# Altium PCB ZERORULERV2.PcbDoc (part 1 of 2)
Units mm, origin at the board's own origin, x right, y up, seen from the top; angles counter-clockwise.
Board outline 204.36 x 30 mm, 2 copper layers (Top, Bottom), stack 1.569 mm thick; 78 components, 0 nets, 1415 pads, 0 vias.
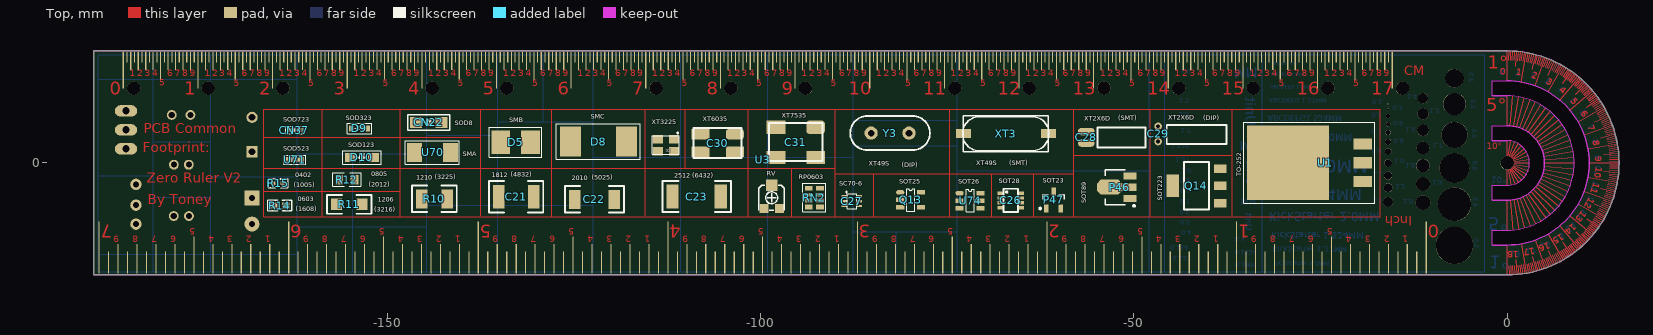
[diagram p0: Top view]
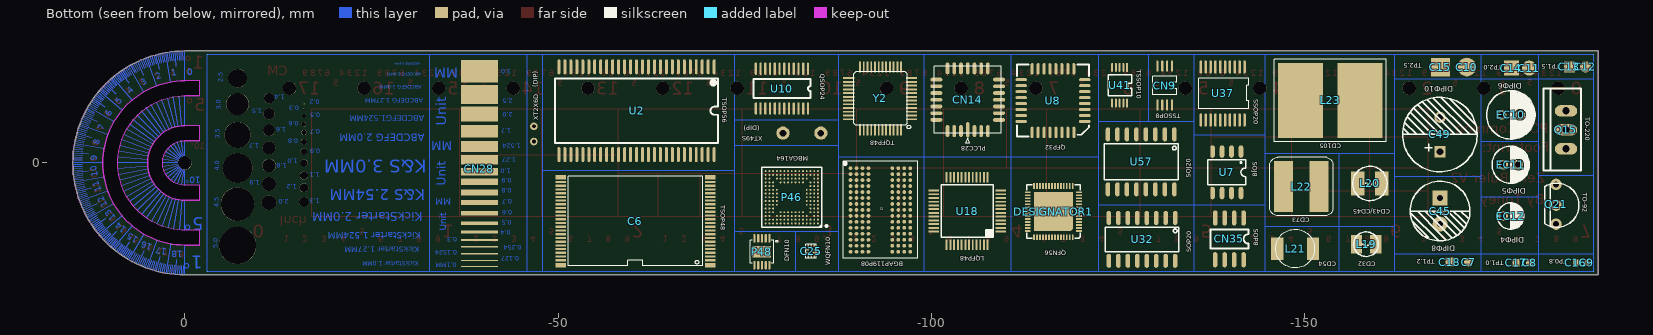
[diagram p1: Bottom view, seen from below]

## Layer stack, top to bottom
Solder Mask Top: solder mask 0.0102, Solder Resist, Dk 3.5
Top: signal copper 0.0343
Dielectric 1: dielectric 1.5, FR-4, Dk 4.3
Bottom: signal copper 0.0343
Solder Mask Bottom: solder mask 0.0102, Solder Resist, Dk 3.5

## Board outline
-189.361,-15 0,-15 ccw(c0,0) 0,15 -189.361,15
cut-out: -2,9 -2,11 0,11 cw(c0,0) 0,-11 -2,-11 -2,-9 0,-9 ccw(c0,0) 0,9
cut-out: -2,3 -2,5 0,5 cw(c0,0) 0,-5 -2,-5 -2,-3 0,-3 ccw(c0,0) 0,3

## Design rules (kind name [scope] priority, off if disabled: settings)
Clearance "Clearance - Default - DEFAULT- SMD" [IsVia vs IsSMTPin] p1: gap=0.152 ignorepadtopadclearanceinfootprint=FALSE
Clearance "Clearance - Default - DEFAULT - Via" [IsVia vs IsVia] p2: gap=0.152 ignorepadtopadclearanceinfootprint=FALSE
Clearance "Clearance - Default - DEFAULT - Net" [All] p3: gap=0.152 ignorepadtopadclearanceinfootprint=FALSE except(0: Arc-Hole Track-Hole SMDPad-Hole THPad-Hole Via-Hole Fill-Hole Poly-Hole Region-Hole Text-Hole; 0.254: Text-Text)
ComponentClearance "ComponentClearance - Default - DEFAULT" [All] p1: gap=0.152 collisioncheckmode=3 verticalgap=0.254 showdistances=FALSE
FanoutControl Fanout_Small [(CompPinCount < 5)] p3: bgadir=Out bgaviamode=Centered fanoutstyle=Auto fanoutdirection=OutThenIn viagrid=0.025 // Fanout_Small (Default Rule)
FanoutControl Fanout_SOIC [IsSOIC] p4: bgadir=Out bgaviamode=Centered fanoutstyle=Auto fanoutdirection=Alternating viagrid=0.025 // Fanout_SOIC (Default Rule)
HoleToHoleClearance "HoleToHoleClearance - Default - DEFAULT" [All] p1: gap=0.152 allowstackedmicrovias=TRUE
Length "Default Length" [All] p1: maxlimit=1270 minlimit=0
MaxMinImpedance "Default Impedance" [All] p1: minimum=50.00 maximum=150.0
ParallelSegment "Default Parallel Segment Adjasent" [All] p1: limit=25.4 gap=5.08
ParallelSegment "Default Parallel Segment Same Layer" [All] p2: limit=25.4 gap=5.08
PlaneConnect "Default PlaneConnect" [All] p1: planeconnectstyle=Relief reliefexpansion=0.508 reliefentries=0 reliefconductorwidth=0.381 reliefairgap=0.254
PolygonConnect "PolygonConnect - Default SMT" [IsSMTPin] p1: connectstyle=Relief reliefconductorwidth=0.254 reliefentries=4 polygonreliefangle="45 Angle" airgapwidth=0.254
PolygonConnect "PolygonConnect - Default Pad" [All] p2: connectstyle=Relief reliefconductorwidth=0.381 reliefentries=4 polygonreliefangle="45 Angle" airgapwidth=0.254
RoutingLayers "RoutingLayers - Default - DEFAULT" [All] p1: top layer_v5=TRUE bottom layer_v5=TRUE
RoutingPriority "RoutingPriority - Default - DEFAULT" [All] p1: routingpriority=3
RoutingTopology "Default Routing Topology" [All] p1: topology=Shortest
RoutingVias "RoutingVias - Default - DEFAULT" [All] p1: holewidth=0.94 width=1.397 viastyle="Through Hole" minholewidth=0.94 minwidth=1.397 maxholewidth=0.94 maxwidth=1.397
SMDToCorner "SMDToCorner - Default - DEFAULT" [All] p1: distance=60000
SolderMaskExpansion [All] p1: expansion=0.102
Width "Default Width" [All] p1: maxlimit=0.305 minlimit=0.152 preferedwidth=0.152
22 further rules are at their usual default settings.

## Components (designator, comment, footprint, x,y, rotation, side; value= is the part's Value field where it differs from the comment)
C4 "BGA119P08" BGA119P08 -93.17,-6.296 r180 bottom
C6 "TSOP-48A" TSOP-48A -70.352,-13.546 r90 bottom
C7 "TP1F" TP1F -171.969,-13.291 r180 bottom
C8 "TP1E" TP1E -180.168,-13.393 r90 bottom
C9 "TP1D" TP1D -187.801,-13.338 r180 bottom
C10 "TP1A" TP1A -171.749,12.852 r270 bottom
C11 "TP1B" TP1B -180.1,12.7 r180 bottom
C12 "TP1CA" TP1CA -187.631,12.863 r180 bottom
C13 "TP1CAA" TP1CAA -185.483,12.863 r180 bottom
C14 "TP1BA" TP1BA -177.7,12.7 r180 bottom
C15 "TP1AA" TP1AA -168.206,12.834 r270 bottom
C16 "TP1DA" TP1DA -186.351,-13.338 r180 bottom
C17 "TP1EA" TP1EA -178.325,-13.393 r90 bottom
C18 "TP1FA" TP1FA -169.446,-13.292 r180 bottom
C21 "1812" 1812 -132.759,-4.532 r0 top
C22 "2010" 2010 -122.258,-4.877 r0 top
C23 "2512" 2512 -108.561,-4.5 r0 top
C25 "WQFN10" WQFN10 -83.888,-11.842 r90 bottom
C26 "SOT28" SOT28 -66.484,-5.014 r0 top
C27 "SC70-6" SC70-6 -87.79,-5.126 r270 top
C28 "XT2X6AA" XT2X6AA -56.361,3.433 r270 top
C29 "XT2X6DAA" XT2X6DAA -46.529,3.818 r90 top
C30 "XT6035SMD" XT6035SMD -105.749,2.664 r180 top
C31 "XT7535SMD" XT7535SMD -94.937,2.778 r180 top
C32 "XT3225SMD" XT3225SMD -112.706,2.387 r180 top
C45 "ECAP3.5$2F$8-DY#" ECAP3.5$2F$8-DY# -168.149,-4.688 r270 bottom
C49 "ECAP-V-4.6$2F$11-DY#" ECAP-V-4.6$2F$11-DY# -168.133,3.811 r90 bottom
CN9 "TSSOP8" TSSOP8 -131.259,10.372 r0 bottom
CN14 "PLCC28" PLCC28 -104.868,8.468 r0 bottom
CN22 "IN4148" IN4148 -144.447,5.422 r180 top
CN28 "PITCHAAAAA" PITCHAAAAA -42.943,0.339 r0 bottom
CN35 "SOP-8" SOP-8 -141.83,-7.381 r270 bottom
CN37 "SOD723" SOD723 -162.451,4.403 r0 top
D5 "SMB" SMB -132.829,2.778 r90 top
D8 "SMC" SMC -121.711,2.873 r0 top
D9 "SOD323" SOD323 -153.627,4.624 r0 top
D10 "SOD-123FL1AAA-DY" SOD-123FL1AAA-DY -153.357,0.755 r180 top
DESIGNATOR1 "QFN56" QFN56 -119.859,-3.014 r0 bottom
EC10 "EC6" EC6 -177.645,6.441 r180 bottom
EC11 "EC5" EC5 -177.602,-0.234 r180 bottom
EC12 "EC4" EC4 -176.592,-7.122 r180 bottom
L19 "L-SMD-4.5AA" L-SMD-4.5AA -158.244,-10.885 r0 bottom
L20 "L-SMD-4.5" L-SMD-4.5 -158.747,-2.751 r0 bottom
L21 "CD54A" CD54A -148.73,-11.473 r90 bottom
L22 "SP6D38" SP6D38 -147.141,-3.161 r90 bottom
L23 "150L" 150L -153.438,8.37 r180 bottom
P46 "Comment" SOT-89 -51.943,-3.251 r180 top
P46 "Comment" MBGA164 -81.3,-4.6 r0 bottom
P47 "Comment" SOT23-3 -60.757,-4.953 r90 top
P48 "Comment" DFN-10 -77.3,-11.9 r270 bottom
Q13 "SOT25" SOT25 -79.9,-5 r0 top
Q14 "SOT223" SOT223 -41.606,-3.065 r90 top
Q15 "TO220-123-DY#" TO220-123-DY# -185.022,1.888 r180 bottom
Q21 "SOT233" SOT233 -183.695,-5.659 r270 bottom
R10 "1210" 1210 -143.706,-4.804 r0 top
R11 "1206" 1206 -155.114,-5.542 r180 top
R12 "0805" 0805 -155.424,-2.243 r180 top
R14 "0603" 0603 -164.399,-5.711 r180 top
R15 "0402" 0402 -164.657,-2.747 r0 top
RN2 "R-2X4P" R-2X4P -92.778,-4.645 r90 top
RV "VR" VR -98.525,-1.07 r180 top
U1 "AIC1084AAAAAA" AIC1084AAAAAA -22.347,0.031 r90 top
U2 "TSOP54P" TSOP54P -60.5,7 r0 bottom
U3 "RULE17AA" RULE17AA -86.079,1.599 r0 top locked
U7 "SOJ8-1.25" SOJ8-1.25 -141.479,1.528 r0 bottom
U8 "QFP32" QFP32 -116.292,8.354 r0 bottom
U10 "QSOP24" QSOP24 -79.977,9.955 r270 bottom
U18 "LQFP48-0.5" LQFP48-0.5 -104.796,-6.443 r90 bottom
U32 "74HC139" 74HC139 -128.221,-10.237 r0 bottom
U37 "SSOP-PCM1606E" SSOP-PCM1606E -137.728,9.307 r270 bottom
U41 "TSSOP-10" TSSOP-10 -125.22,10.412 r0 bottom
U57 "SOJ16" SOJ16 -128.1,0.152 r0 bottom
U70 "SMA" SMA -146.088,1.398 r0 top
U71 "SOD523-DY#" SOD523-DY# -162.414,0.45 r0 top
U74 "SOT26" SOT26 -71.939,-5.046 r0 top
XT3 "XTAL5$2F$S" XTAL5$2F$S -67.139,3.923 r0 top
Y2 "TQFP48" TQFP48 -93.194,8.609 r0 bottom
Y3 "X1" X1 -80.12,4 r0 top

## Footprints (in the part's own frame and the unit in brackets; to place one, negate y for a bottom-side part, rotate by r counter-clockwise, add the part's x,y. Pads: shape width x height; smd on the part's side, far side on the other; paste and mask are expansions set on the pad)
74HC139 [mil]
  oval 24x74 smd: 1(-175,-113) 2(-125,-113) 3(-75,-113) 4(-25,-113) 5(25,-113) 6(75,-113) 7(125,-113) 8(175,-113) 9(175,113) 10(125,113) 11(75,113) 12(25,113) 13(-25,113) 14(-75,113) 15(-125,113) 16(-175,113)
  silkscreen extent -195,-65 195,65
150L [mm]
  rect 6x10 smd: 1(-4,0) 2(4,0)
  silkscreen extent -7.5,-5.5 7.5,5.5
0402 [mil]
  rect 25x20 smd: 1(-25,0) 2(25,0)
  silkscreen extent -51,-24 51,24
0603 [mil]
  rect 38x30 smd: 1(-31,0) 2(31,0)
  silkscreen extent -63,-28 63,28
0805 [mil]
  rect 40x50 smd: 1(-40,0) 2(40,0)
  silkscreen extent -75,-36 75,36
1206 [mil]
  rect 60x60 smd: 1(-67.5,0) 2(67.5,0)
  silkscreen extent -118,-50 118,50
1210 [mil]
  rect 60x100 smd: 1(-67.5,0) 2(67.5,0)
  silkscreen extent -118,-70 118,70
1812 [mil]
  rect 60x125 smd: 1(-92.5,0) 2(92.5,0)
  silkscreen extent -143,-82 143,82
2010 [mil]
  rect 60x100 smd: 1(-105,0) 2(105,0)
  silkscreen extent -155,-70 155,70
2512 [mil]
  rect 65x125 smd: 1(-127.5,0) 2(127.5,0)
  silkscreen extent -180,-82 180,82
AIC1084AAAAAA [mm]
  rect 1.5x2.5 smd: 1(-2.5,-3) 2(0,-3) 3(2.5,-3)
  rect 10x11 smd: 4(0,7)
  silkscreen extent -5.4,-4.65 5.4,12.9
BGA119P08 [mm]
  round 0.5 smd: A1(-4,5.6) A2(-3.2,5.6) A3(-2.4,5.6) A4(-1.6,5.6) A8(1.6,5.6) A9(2.4,5.6) A10(3.2,5.6) A11(4,5.6) B1(-4,4.8) B2(-3.2,4.8) B3(-2.4,4.8) B4(-1.6,4.8) B8(1.6,4.8) B9(2.4,4.8) B10(3.2,4.8) B11(4,4.8) C1(-4,4) C2(-3.2,4) C3(-2.4,4) C4(-1.6,4) C8(1.6,4) C9(2.4,4) C10(3.2,4) C11(4,4) D1(-4,3.2) D2(-3.2,3.2) D3(-2.4,3.2) D4(-1.6,3.2) D8(1.6,3.2) D9(2.4,3.2) D10(3.2,3.2) D11(4,3.2) E1(-4,2.4) E2(-3.2,2.4) E3(-2.4,2.4) E4(-1.6,2.4) E8(1.6,2.4) E9(2.4,2.4) E10(3.2,2.4) E11(4,2.4) F1(-4,1.6) F2(-3.2,1.6) F3(-2.4,1.6) F4(-1.6,1.6) F8(1.6,1.6) F9(2.4,1.6) F10(3.2,1.6) F11(4,1.6) G1(-4,0.8) G2(-3.2,0.8) G3(-2.4,0.8) G4(-1.6,0.8) G8(1.6,0.8) G9(2.4,0.8) G10(3.2,0.8) G11(4,0.8) H1(-4,0) H2(-3.2,0) H3(-2.4,0) H4(-1.6,0) H8(1.6,0) H9(2.4,0) H10(3.2,0) H11(4,0) J1(-4,-0.8) J2(-3.2,-0.8) J3(-2.4,-0.8) J4(-1.6,-0.8) J8(1.6,-0.8) J9(2.4,-0.8) J10(3.2,-0.8) J11(4,-0.8) K1(-4,-1.6) K2(-3.2,-1.6) K3(-2.4,-1.6) K4(-1.6,-1.6) K8(1.6,-1.6) K9(2.4,-1.6) K10(3.2,-1.6) K11(4,-1.6) L1(-4,-2.4) L2(-3.2,-2.4) L3(-2.4,-2.4) L4(-1.6,-2.4) L8(1.6,-2.4) L9(2.4,-2.4) L10(3.2,-2.4) L11(4,-2.4) M1(-4,-3.2) M2(-3.2,-3.2) M3(-2.4,-3.2) M4(-1.6,-3.2) M8(1.6,-3.2) M9(2.4,-3.2) M10(3.2,-3.2) M11(4,-3.2) N1(-4,-4) N2(-3.2,-4) N3(-2.4,-4) N4(-1.6,-4) N8(1.6,-4) N9(2.4,-4) N10(3.2,-4) N11(4,-4) P1(-4,-4.8) P2(-3.2,-4.8) P3(-2.4,-4.8) P4(-1.6,-4.8) P8(1.6,-4.8) P9(2.4,-4.8) P10(3.2,-4.8) P11(4,-4.8) R1(-4,-5.6) R2(-3.2,-5.6) R3(-2.4,-5.6) R4(-1.6,-5.6) R8(1.6,-5.6) R9(2.4,-5.6) R10(3.2,-5.6) R11(4,-5.6)
  silkscreen extent -5,-6.5 5,6.5
CD54A [mm]
  rect 3x1.65 smd: 1(0,2.4) 2(0,-2.4)
  silkscreen extent -2.6,-2.6 2.6,2.6
DFN-10 [mm]
  rect 1.15x0.3 smd: 1(-1.8,1)
  oval 1.15x0.3 smd: 2(-1.8,0.5) 3(-1.8,0) 4(-1.8,-0.5) 5(-1.8,-1) 6(1.8,-1) 7(1.8,-0.5) 8(1.8,0) 9(1.8,0.5) 10(1.8,1)
  rect 1.55x2.48 smd: 11(0,0)
  silkscreen extent -1.55,-1.55 1.55,2.14, body extent -1.5,-1.5 1.5,1.5, height 0.8
EC4 [mil]
  round 52 hole 32: 1(0,0) 2(80,0)
  silkscreen extent -30,-70 110,70
EC5 [mil]
  round 52 hole 32: 1(-39,0) 2(39.74,0)
  silkscreen extent -98,-98 99,98
EC6 [mil]
  round 52 hole 32: 1(-49.21,0) 2(49.21,0)
  silkscreen extent -128,-128 128,128
ECAP3.5$2F$8-DY# [mm]
  rect 2x2 hole 0.8: 1(0,0)
  round 2 hole 0.8: 2(3.5,0)
  silkscreen extent -2.25,-4 5.75,4
ECAP-V-4.6$2F$11-DY# [mm]
  rect 1.5x1.5 hole 0.9: 1(-2.3,0)
  round 1.5 hole 0.9: 2(2.3,0)
  silkscreen extent -5,-5 5,5
IN4148 [mm]
  rect 1.6x1.5 smd: 1(-1.7,0) 2(1.7,0)
  silkscreen extent -2.81,-1 2.8,1.02
L-SMD-4.5 [mm]
  rect 1.8x3.2 smd: 1(-1.6,0) 2(1.6,0)
  silkscreen extent -2.3,-2.3 2.3,2.3
L-SMD-4.5AA [mm]
  rect 1.5x2.5 smd: 1(-1.3,0) 2(1.3,0)
  silkscreen extent -1.65,-1.65 1.65,1.65
LQFP48-0.5 [mm]
  rect 0.254x1.397 smd: 1(-2.75,-4.5) 2(-2.25,-4.5) 3(-1.75,-4.5) 4(-1.25,-4.5) 5(-0.75,-4.5) 6(-0.25,-4.5) 7(0.25,-4.5) 8(0.75,-4.5) 9(1.25,-4.5) 10(1.75,-4.5) 11(2.25,-4.5) 12(2.75,-4.5) 25(2.75,4.5) 26(2.25,4.5) 27(1.75,4.5) 28(1.25,4.5) 29(0.75,4.5) 30(0.25,4.5) 31(-0.25,4.5) 32(-0.75,4.5) 33(-1.25,4.5) 34(-1.75,4.5) 35(-2.25,4.5) 36(-2.75,4.5)
  rect 1.397x0.254 smd: 13(4.5,-2.75) 14(4.5,-2.25) 15(4.5,-1.75) 16(4.5,-1.25) 17(4.5,-0.75) 18(4.5,-0.25) 19(4.5,0.25) 20(4.5,0.75) 21(4.5,1.25) 22(4.5,1.75) 23(4.5,2.25) 24(4.5,2.75) 37(-4.5,2.75) 38(-4.5,2.25) 39(-4.5,1.75) 40(-4.5,1.25) 41(-4.5,0.75) 42(-4.5,0.25) 43(-4.5,-0.25) 44(-4.5,-0.75) 45(-4.5,-1.25) 46(-4.5,-1.75) 47(-4.5,-2.25) 48(-4.5,-2.75)
  silkscreen extent -3.5,-3.5 3.5,3.5
MBGA164 [mm] "BGA, 164-Leads, Body 8x8mm, Pitch 0.5mm"
  round 0.25 smd: A1(-3.5,3.5) A2(-3,3.5) A3(-2.5,3.5) A4(-2,3.5) A5(-1.5,3.5) A6(-1,3.5) A7(-0.5,3.5) A8(0,3.5) A9(0.5,3.5) A10(1,3.5) A11(1.5,3.5) A12(2,3.5) A13(2.5,3.5) A14(3,3.5) A15(3.5,3.5) B1(-3.5,3) B2(-3,3) B3(-2.5,3) B4(-2,3) B5(-1.5,3) B6(-1,3) B7(-0.5,3) B8(0,3) B9(0.5,3) B10(1,3) B11(1.5,3) B12(2,3) B13(2.5,3) B14(3,3) B15(3.5,3) C1(-3.5,2.5) C2(-3,2.5) C4(-2,2.5) C5(-1.5,2.5) C6(-1,2.5) C7(-0.5,2.5) C8(0,2.5) C9(0.5,2.5) C10(1,2.5) C11(1.5,2.5) C12(2,2.5) C14(3,2.5) C15(3.5,2.5) D1(-3.5,2) D2(-3,2) D3(-2.5,2) D5(-1.5,2) D6(-1,2) D7(-0.5,2) D8(0,2) D9(0.5,2) D10(1,2) D11(1.5,2) D13(2.5,2) D14(3,2) D15(3.5,2) E1(-3.5,1.5) E2(-3,1.5) E3(-2.5,1.5) E13(2.5,1.5) E14(3,1.5) E15(3.5,1.5) F1(-3.5,1) F2(-3,1) F3(-2.5,1) F4(-2,1) F12(2,1) F13(2.5,1) F14(3,1) F15(3.5,1) G1(-3.5,0.5) G2(-3,0.5) G3(-2.5,0.5) G4(-2,0.5) G12(2,0.5) G13(2.5,0.5) G14(3,0.5) G15(3.5,0.5) H1(-3.5,0) H2(-3,0) H3(-2.5,0) H4(-2,0) H12(2,0) H13(2.5,0) H14(3,0) H15(3.5,0) J1(-3.5,-0.5) J2(-3,-0.5) J3(-2.5,-0.5) J4(-2,-0.5) J12(2,-0.5) J13(2.5,-0.5) J14(3,-0.5) J15(3.5,-0.5) K1(-3.5,-1) K2(-3,-1) K3(-2.5,-1) K4(-2,-1) K12(2,-1) K13(2.5,-1) K14(3,-1) K15(3.5,-1) L1(-3.5,-1.5) L2(-3,-1.5) L3(-2.5,-1.5) L13(2.5,-1.5) L14(3,-1.5) L15(3.5,-1.5) M1(-3.5,-2) M2(-3,-2) M3(-2.5,-2) M5(-1.5,-2) M6(-1,-2) M7(-0.5,-2) M8(0,-2) M9(0.5,-2) M10(1,-2) M11(1.5,-2) M13(2.5,-2) M14(3,-2) M15(3.5,-2) N1(-3.5,-2.5) N2(-3,-2.5) N4(-2,-2.5) N5(-1.5,-2.5) N6(-1,-2.5) N7(-0.5,-2.5) N8(0,-2.5) N9(0.5,-2.5) N10(1,-2.5) N11(1.5,-2.5) N12(2,-2.5) N14(3,-2.5) N15(3.5,-2.5) P1(-3.5,-3) P2(-3,-3) P3(-2.5,-3) P4(-2,-3) P5(-1.5,-3) P6(-1,-3) P7(-0.5,-3) P8(0,-3) P9(0.5,-3) P10(1,-3) P11(1.5,-3) P12(2,-3) P13(2.5,-3) P14(3,-3) P15(3.5,-3) R1(-3.5,-3.5) R2(-3,-3.5) R3(-2.5,-3.5) R4(-2,-3.5) R5(-1.5,-3.5) R6(-1,-3.5) R7(-0.5,-3.5) R8(0,-3.5) R9(0.5,-3.5) R10(1,-3.5) R11(1.5,-3.5) R12(2,-3.5) R13(2.5,-3.5) R14(3,-3.5) R15(3.5,-3.5)
  silkscreen extent -4.77,-4 4,4, body extent -4,-4 4,4, height 1.2
PITCHAAAAA [mm]
  rect 5x0.1 smd: 1(3.481,14.233)
  rect 5x0.127 smd: 2(3.481,13.428)
  rect 5x0.152 smd: 3(3.481,12.507)
  rect 5x0.2 smd: 4(3.481,11.589)
  rect 5x0.3 smd: 5(3.481,10.647)
  rect 5x0.4 smd: 6(3.481,9.592)
  rect 5x0.5 smd: 7(3.481,8.409)
  rect 5x0.6 smd: 8(3.481,7.105)
  rect 5x0.7 smd: 9(3.481,5.645)
  rect 5x0.8 smd: 10(3.481,4.311)
  rect 5x0.9 smd: 11(3.481,2.852)
  rect 5x1 smd: 12(3.481,1.509)
  rect 5x1.25 smd: 13(3.481,-0.081)
  rect 5x1.5 smd: 14(3.481,-1.874)
  rect 5x1.7 smd: 15(3.481,-3.915)
  rect 5x2 smd: 16(3.481,-6.191)
  rect 5x2.5 smd: 17(3.481,-8.84)
  rect 5x3 smd: 18(3.481,-11.971)
PLCC28 [mm]
  oval 0.5x2 smd: 1(0,4)
  oval 0.5x1.6 smd: 2(-0.9,4.2) 3(-1.8,4.2) 4(-2.7,4.2) 12(-2.7,-4.2) 13(-1.8,-4.2) 14(-0.9,-4.2) 15(0,-4.2) 16(0.9,-4.2) 17(1.8,-4.2) 18(2.7,-4.2) 26(2.7,4.2) 27(1.8,4.2) 28(0.9,4.2)
  oval 1.6x0.5 smd: 5(-4.2,2.7) 6(-4.2,1.8) 7(-4.2,0.9) 8(-4.2,0) 9(-4.2,-0.9) 10(-4.2,-1.8) 11(-4.2,-2.7) 19(4.2,-2.7) 20(4.2,-1.8) 21(4.2,-0.9) 22(4.2,0) 23(4.2,0.9) 24(4.2,1.8) 25(4.2,2.7)
  silkscreen extent -4.5,-4.5 4.5,5.8
QFN56 [mm]
  rect 0.75x0.22 smd: 1(0.075,6.1) 2(0.075,5.7) 3(0.075,5.3) 4(0.075,4.9) 5(0.075,4.5) 6(0.075,4.1) 7(0.075,3.7) 8(0.075,3.3) 9(0.075,2.9) 10(0.075,2.5) 11(0.075,2.1) 12(0.075,1.7) 13(0.075,1.3) 14(0.075,0.9) 29(6.925,0.9) 30(6.925,1.3) 31(6.925,1.7) 32(6.925,2.1) 33(6.925,2.5) 34(6.925,2.9) 35(6.925,3.3) 36(6.925,3.7) 37(6.925,4.1) 38(6.925,4.5) 39(6.925,4.9) 40(6.925,5.3) 41(6.925,5.7) 42(6.925,6.1)
  rect 0.22x0.75 smd: 15(0.9,0.075) 16(1.3,0.075) 17(1.7,0.075) 18(2.1,0.075) 19(2.5,0.075) 20(2.9,0.075) 21(3.3,0.075) 22(3.7,0.075) 23(4.1,0.075) 24(4.5,0.075) 25(4.9,0.075) 26(5.3,0.075) 27(5.7,0.075) 28(6.1,0.075) 43(6.1,6.925) 44(5.7,6.925) 45(5.3,6.925) 46(4.9,6.925) 47(4.5,6.925) 48(4.1,6.925) 49(3.7,6.925) 50(3.3,6.925) 51(2.9,6.925) 52(2.5,6.925) 53(2.1,6.925) 54(1.7,6.925) 55(1.3,6.925) 56(0.9,6.925)
  rect 5.2x4.9 smd: 57(3.5,3.35)
  oct 1.2x1.2 smd: $$$1(1.5,5.5)
  rect 4.5x0.3 smd: $$$2(3.85,5.95)
  silkscreen extent -0.1,-0.1 7.1,7.1
QFP32 [mil]
  oval 60x16 smd: 1(-167.5,110.25) 2(-167.5,78.75) 3(-167.5,47.25) 4(-167.5,15.75) 5(-167.5,-15.75) 6(-167.5,-47.25) 7(-167.5,-78.75) 8(-167.5,-110.25) 17(167.5,-110.25) 18(167.5,-78.75) 19(167.5,-47.25) 20(167.5,-15.75) 21(167.5,15.75) 22(167.5,47.25) 23(167.5,78.75) 24(167.5,110.25)
  oval 16x60 smd: 9(-110.25,-167.5) 10(-78.75,-167.5) 11(-47.25,-167.5) 12(-15.75,-167.5) 13(15.75,-167.5) 14(47.25,-167.5) 15(78.75,-167.5) 16(110.25,-167.5) 25(110.25,167.5) 26(78.75,167.5) 27(47.25,167.5) 28(15.75,167.5) 29(-15.75,167.5) 30(-47.25,167.5) 31(-78.75,167.5) 32(-110.25,167.5)
  silkscreen extent -190,-190 190,190
QSOP24 [mil]
  oval 65x12 smd: 1(-105,137.5) 2(-105,112.5) 3(-105,87.5) 4(-105,62.5) 5(-105,37.5) 6(-105,12.5) 7(-105,-12.5) 8(-105,-37.5) 9(-105,-62.5) 10(-105,-87.5) 11(-105,-112.5) 12(-105,-137.5) 13(105,-137.5) 14(105,-112.5) 15(105,-87.5) 16(105,-62.5) 17(105,-37.5) 18(105,-12.5) 19(105,12.5) 20(105,37.5) 21(105,62.5) 22(105,87.5) 23(105,112.5) 24(105,137.5)
  silkscreen extent -50,-150 50,150
R-2X4P [mil]
  rect 25x40 smd: 1(-50,-29) 4(50,-29) 5(50,31) 8(-50,31)
  rect 20x40 smd: 2(-15,-29) 3(15,-29) 6(15,31) 7(-15,31)
  silkscreen extent -75,-59 75,61
RULE17AA [mm]
  rect 0.15x7 smd: 201(-102.547,-12.937) 221(-77.147,-12.937) 241(-51.747,-12.937) 261(-26.347,-12.937) 281(-0.947,-12.937) 301(24.453,-12.937) 321(49.853,-12.937) 341(75.253,-12.937)
  rect 0.15x3 smd: 202(-101.277,-14.937) 204(-98.737,-14.937) 206(-96.197,-14.937) 208(-93.657,-14.937) 210(-91.117,-14.937) 212(-88.577,-14.937) 214(-86.037,-14.937) 216(-83.497,-14.937) 218(-80.957,-14.937) 220(-78.417,-14.937) 222(-75.877,-14.937) 224(-73.337,-14.937) 226(-70.797,-14.937) 228(-68.257,-14.937) 230(-65.717,-14.937) 232(-63.177,-14.937) 234(-60.637,-14.937) 236(-58.097,-14.937) 238(-55.557,-14.937) 240(-53.017,-14.937) 242(-50.477,-14.937) 244(-47.937,-14.937) 246(-45.397,-14.937) 248(-42.857,-14.937) 250(-40.317,-14.937) 252(-37.777,-14.937) 254(-35.237,-14.937) 256(-32.697,-14.937) 258(-30.157,-14.937) 260(-27.617,-14.937) 262(-25.077,-14.937) 264(-22.537,-14.937) 266(-19.997,-14.937) 268(-17.457,-14.937) 270(-14.917,-14.937) 272(-12.377,-14.937) 274(-9.837,-14.937) 276(-7.297,-14.937) 278(-4.757,-14.937) 280(-2.217,-14.937) 282(0.323,-14.937) 284(2.863,-14.937) 286(5.403,-14.937) 288(7.943,-14.937) 290(10.483,-14.937) 292(13.023,-14.937) 294(15.563,-14.937) 296(18.103,-14.937) 298(20.643,-14.937) 300(23.183,-14.937) 302(25.723,-14.937) 304(28.263,-14.937) 306(30.803,-14.937) 308(33.343,-14.937) 310(35.883,-14.937) 312(38.423,-14.937) 314(40.963,-14.937) 316(43.503,-14.937) 318(46.043,-14.937) 320(48.583,-14.937) 322(51.123,-14.937) 324(53.663,-14.937) 326(56.203,-14.937) 328(58.743,-14.937) 330(61.283,-14.937) 332(63.823,-14.937) 334(66.363,-14.937) 336(68.903,-14.937) 338(71.443,-14.937) 340(73.983,-14.937)
  rect 0.15x4 smd: 203(-100.007,-14.437) 205(-97.467,-14.437) 207(-94.927,-14.437) 209(-92.387,-14.437) 213(-87.307,-14.437) 215(-84.767,-14.437) 217(-82.227,-14.437) 219(-79.687,-14.437) 223(-74.607,-14.437) 225(-72.067,-14.437) 227(-69.527,-14.437) 229(-66.987,-14.437) 233(-61.907,-14.437) 235(-59.367,-14.437) 237(-56.827,-14.437) 239(-54.287,-14.437) 243(-49.207,-14.437) 245(-46.667,-14.437) 247(-44.127,-14.437) 249(-41.587,-14.437) 253(-36.507,-14.437) 255(-33.967,-14.437) 257(-31.427,-14.437) 259(-28.887,-14.437) 263(-23.807,-14.437) 265(-21.267,-14.437) 267(-18.727,-14.437) 269(-16.187,-14.437) 273(-11.107,-14.437) 275(-8.567,-14.437) 277(-6.027,-14.437) 279(-3.487,-14.437) 283(1.593,-14.437) 285(4.133,-14.437) 287(6.673,-14.437) 289(9.213,-14.437) 293(14.293,-14.437) 295(16.833,-14.437) 297(19.373,-14.437) 299(21.913,-14.437) 303(26.993,-14.437) 305(29.533,-14.437) 307(32.073,-14.437) 309(34.613,-14.437) 313(39.693,-14.437) 315(42.233,-14.437) 317(44.773,-14.437) 319(47.313,-14.437) 323(52.393,-14.437) 325(54.933,-14.437) 327(57.473,-14.437) 329(60.013,-14.437) 333(65.093,-14.437) 335(67.633,-14.437) 337(70.173,-14.437) 339(72.713,-14.437)
  rect 0.15x5 smd: 211(-89.847,-13.937) 231(-64.447,-13.937) 251(-39.047,-13.937) 271(-13.647,-13.937) 291(11.753,-13.937) 311(37.153,-13.937) 331(62.553,-13.937)
  rect 0.152x5 smd: 362(-99.304,10.863) 372(-89.304,10.863) 382(-79.304,10.863) 392(-69.304,10.863) 402(-59.304,10.863) 412(-49.304,10.863) 422(-39.304,10.863) 432(-29.304,10.863) 442(-19.304,10.863) 452(-9.304,10.863) 462(0.696,10.863) 472(10.696,10.863) 482(20.696,10.863) 492(30.696,10.863) 502(40.696,10.863) 512(50.696,10.863) 522(60.696,10.863) 532(70.696,10.863)
  rect 0.152x2.5 smd: 363(-98.304,12.113) 364(-97.304,12.113) 365(-96.304,12.113) 366(-95.304,12.113) 368(-93.304,12.113) 369(-92.304,12.113) 370(-91.304,12.113) 371(-90.304,12.113) 373(-88.304,12.113) 374(-87.304,12.113) 375(-86.304,12.113) 376(-85.304,12.113) 378(-83.304,12.113) 379(-82.304,12.113) 380(-81.304,12.113) 381(-80.304,12.113) 383(-78.304,12.113) 384(-77.304,12.113) 385(-76.304,12.113) 386(-75.304,12.113) 388(-73.304,12.113) 389(-72.304,12.113) 390(-71.304,12.113) 391(-70.304,12.113) 393(-68.304,12.113) 394(-67.304,12.113) 395(-66.304,12.113) 396(-65.304,12.113) 398(-63.304,12.113) 399(-62.304,12.113) 400(-61.304,12.113) 401(-60.304,12.113) 403(-58.304,12.113) 404(-57.304,12.113) 405(-56.304,12.113) 406(-55.304,12.113) 408(-53.304,12.113) 409(-52.304,12.113) 410(-51.304,12.113) 411(-50.304,12.113) 413(-48.304,12.113) 414(-47.304,12.113) 415(-46.304,12.113) 416(-45.304,12.113) 418(-43.304,12.113) 419(-42.304,12.113) 420(-41.304,12.113) 421(-40.304,12.113) 423(-38.304,12.113) 424(-37.304,12.113) 425(-36.304,12.113) 426(-35.304,12.113) 428(-33.304,12.113) 429(-32.304,12.113) 430(-31.304,12.113) 431(-30.304,12.113) 433(-28.304,12.113) 434(-27.304,12.113) 435(-26.304,12.113) 436(-25.304,12.113) 438(-23.304,12.113) 439(-22.304,12.113) 440(-21.304,12.113) 441(-20.304,12.113) 443(-18.304,12.113) 444(-17.304,12.113) 445(-16.304,12.113) 446(-15.304,12.113) 448(-13.304,12.113) 449(-12.304,12.113) 450(-11.304,12.113) 451(-10.304,12.113) 453(-8.304,12.113) 454(-7.304,12.113) 455(-6.304,12.113) 456(-5.304,12.113) 458(-3.304,12.113) 459(-2.304,12.113) 460(-1.304,12.113) 461(-0.304,12.113) 463(1.696,12.113) 464(2.696,12.113) 465(3.696,12.113) 466(4.696,12.113) 468(6.696,12.113) 469(7.696,12.113) 470(8.696,12.113) 471(9.696,12.113) 473(11.696,12.113) 474(12.696,12.113) 475(13.696,12.113) 476(14.696,12.113) 478(16.696,12.113) 479(17.696,12.113) 480(18.696,12.113) 481(19.696,12.113) 483(21.696,12.113) 484(22.696,12.113) 485(23.696,12.113) 486(24.696,12.113) 488(26.696,12.113) 489(27.696,12.113) 490(28.696,12.113) 491(29.696,12.113) 493(31.696,12.113) 494(32.696,12.113) 495(33.696,12.113) 496(34.696,12.113) 498(36.696,12.113) 499(37.696,12.113) 500(38.696,12.113) 501(39.696,12.113) 503(41.696,12.113) 504(42.696,12.113) 505(43.696,12.113) 506(44.696,12.113) 508(46.696,12.113) 509(47.696,12.113) 510(48.696,12.113) 511(49.696,12.113) 513(51.696,12.113) 514(52.696,12.113) 515(53.696,12.113) 516(54.696,12.113) 518(56.696,12.113) 519(57.696,12.113) 520(58.696,12.113) 521(59.696,12.113) 523(61.696,12.113) 524(62.696,12.113) 525(63.696,12.113) 526(64.696,12.113) 528(66.696,12.113) 529(67.696,12.113) 530(68.696,12.113) 531(69.696,12.113)
  rect 0.152x3.75 smd: 367(-94.304,11.488) 377(-84.304,11.488) 387(-74.304,11.488) 397(-64.304,11.488) 407(-54.304,11.488) 417(-44.304,11.488) 427(-34.304,11.488) 437(-24.304,11.488) 447(-14.304,11.488) 457(-4.304,11.488) 467(5.696,11.488) 477(15.696,11.488) 487(25.696,11.488) 497(35.696,11.488) 507(45.696,11.488) 517(55.696,11.488) 527(65.696,11.488)
  rect 0.152x1.5 smd: 563(-98.804,12.613) 564(-97.804,12.613) 565(-96.804,12.613) 566(-95.804,12.613) 567(-94.804,12.613) 568(-93.804,12.613) 569(-92.804,12.613) 570(-91.804,12.613) 571(-90.804,12.613) 572(-89.804,12.613) 573(-88.804,12.613) 574(-87.804,12.613) 575(-86.804,12.613) 576(-85.804,12.613) 577(-84.804,12.613) 578(-83.804,12.613) 579(-82.804,12.613) 580(-81.804,12.613) 581(-80.804,12.613) 582(-79.804,12.613) 583(-78.804,12.613) 584(-77.804,12.613) 585(-76.804,12.613) 586(-75.804,12.613) 587(-74.804,12.613) 588(-73.804,12.613) 589(-72.804,12.613) 590(-71.804,12.613) 591(-70.804,12.613) 592(-69.804,12.613) 593(-68.804,12.613) 594(-67.804,12.613) 595(-66.804,12.613) 596(-65.804,12.613) 597(-64.804,12.613) 598(-63.804,12.613) 599(-62.804,12.613) 600(-61.804,12.613) 601(-60.804,12.613) 602(-59.804,12.613) 603(-58.804,12.613) 604(-57.804,12.613) 605(-56.804,12.613) 606(-55.804,12.613) 607(-54.804,12.613) 608(-53.804,12.613) 609(-52.804,12.613) 610(-51.804,12.613) 611(-50.804,12.613) 612(-49.804,12.613) 613(-48.804,12.613) 614(-47.804,12.613) 615(-46.804,12.613) 616(-45.804,12.613) 617(-44.804,12.613) 618(-43.804,12.613) 619(-42.804,12.613) 620(-41.804,12.613) 621(-40.804,12.613) 622(-39.804,12.613) 623(-38.804,12.613) 624(-37.804,12.613) 625(-36.804,12.613) 626(-35.804,12.613) 627(-34.804,12.613) 628(-33.804,12.613) 629(-32.804,12.613) 630(-31.804,12.613) 631(-30.804,12.613) 632(-29.804,12.613) 633(-28.804,12.613) 634(-27.804,12.613) 635(-26.804,12.613) 636(-25.804,12.613) 637(-24.804,12.613) 638(-23.804,12.613) 639(-22.804,12.613) 640(-21.804,12.613) 641(-20.804,12.613) 642(-19.804,12.613) 643(-18.804,12.613) 644(-17.804,12.613) 645(-16.804,12.613) 646(-15.804,12.613) 647(-14.804,12.613) 648(-13.804,12.613) 649(-12.804,12.613) 650(-11.804,12.613) 651(-10.804,12.613) 652(-9.804,12.613) 653(-8.804,12.613) 654(-7.804,12.613) 655(-6.804,12.613) 656(-5.804,12.613) 657(-4.804,12.613) 658(-3.804,12.613) 659(-2.804,12.613) 660(-1.804,12.613) 661(-0.804,12.613) 662(0.196,12.613) 663(1.196,12.613) 664(2.196,12.613) 665(3.196,12.613) 666(4.196,12.613) 667(5.196,12.613) 668(6.196,12.613) 669(7.196,12.613) 670(8.196,12.613) 671(9.196,12.613) 672(10.196,12.613) 673(11.196,12.613) 674(12.196,12.613) 675(13.196,12.613) 676(14.196,12.613) 677(15.196,12.613) 678(16.196,12.613) 679(17.196,12.613) 680(18.196,12.613) 681(19.196,12.613) 682(20.196,12.613) 683(21.196,12.613) 684(22.196,12.613) 685(23.196,12.613) 686(24.196,12.613) 687(25.196,12.613) 688(26.196,12.613) 689(27.196,12.613) 690(28.196,12.613) 691(29.196,12.613) 692(30.196,12.613) 693(31.196,12.613) 694(32.196,12.613) 695(33.196,12.613) 696(34.196,12.613) 697(35.196,12.613) 698(36.196,12.613) 699(37.196,12.613) 700(38.196,12.613) 701(39.196,12.613) 702(40.196,12.613) 703(41.196,12.613) 704(42.196,12.613) 705(43.196,12.613) 706(44.196,12.613) 707(45.196,12.613) 708(46.196,12.613) 709(47.196,12.613) 710(48.196,12.613) 711(49.196,12.613) 712(50.196,12.613) 713(51.196,12.613) 714(52.196,12.613) 715(53.196,12.613) 716(54.196,12.613) 717(55.196,12.613) 718(56.196,12.613) 719(57.196,12.613) 720(58.196,12.613) 721(59.196,12.613) 722(60.196,12.613) 723(61.196,12.613) 724(62.196,12.613) 725(63.196,12.613) 726(64.196,12.613) 727(65.196,12.613) 728(66.196,12.613) 729(67.196,12.613) 730(68.196,12.613) 731(69.196,12.613) 732(70.196,12.613)
SC70-6 [mm]
  rect 0.3x0.8 smd: 1(-0.65,-0.975) 2(0,-0.975) 3(0.65,-0.975) 4(0.65,0.975) 5(0,0.975) 6(-0.65,0.975)
  silkscreen extent -1.32,-0.78 0.98,0.63
SMA [mm]
  rect 2x2.54 smd: 1(4.562,0.022) 2(-0.297,0.001)
  silkscreen extent -1.54,-1.58 5.74,1.55
SMB [mm]
  rect 3.2x2.5 smd: 1(0,2) 2(0,-2)
  silkscreen extent -2,-3.53 2,3.55
SMC [mm]
  rect 2.8x4 smd: 1(3.746,0) 2(-3.746,0)
  silkscreen extent -5.7,-2.4 5.6,2.4
SOD323 [mm]
  rect 0.63x0.83 smd: 1(-1.235,-0.001) 2(0.995,-0.001)
  silkscreen extent -1.74,-0.7 1.5,0.7
SOD523-DY# [mm]
  rect 0.9x0.7 smd: 1(-0.8,0) 2(0.8,0)
  silkscreen extent -1.5,-0.61 1.5,0.6
SOD723 [mil]
  rect 25x20 smd: 1(-25,0) 2(25,0)
  silkscreen extent -47,-20 47,20
SOD-123FL1AAA-DY [mm]
  rect 1.5x1.2 smd: 1(-1.5,0) 2(1.6,0)
  silkscreen extent -2.5,-0.9 2.61,0.9
SOJ8-1.25 [mil]
  oval 24x66 smd: 1(0,0) 2(50,0) 3(100,0) 4(150,0) 5(150,219) 6(100,219) 7(50,219) 8(0,219)
  silkscreen extent -25,44 175,175
SOJ16 [mil]
  oval 24x74 smd: 1(-175,-145) 2(-125,-145) 3(-75,-145) 4(-25,-145) 5(25,-145) 6(75,-145) 7(125,-145) 8(175,-145) 9(175,145) 10(125,145) 11(75,145) 12(25,145) 13(-25,145) 14(-75,145) 15(-125,145) 16(-175,145)
  silkscreen extent -195,-95 195,95
SOP-8 [mil]
  oval 80x24 smd: 1(0,0) 2(0,-50) 3(0,-100) 4(0,-150) 5(220,-150) 6(220,-100) 7(220,-50) 8(220,0)
  silkscreen extent 60,-175 160,25
SOT23-3 [mm] "SOT23, 3-Leads, Body 3.0x2.5mm (max), Pitch 0.95mm, IPC Medium Density"
  rect 1.05x0.6 smd: 1(-1.15,0.95) 2(-1.15,-0.95) 3(1.15,0)
  silkscreen extent -1.27,-1.45 0.7,1.92, body extent -1.2,-1.45 1.2,1.45, height 1
SOT25 [mm]
  oval 1.1x0.6 smd: 1(-1.4,1.052)
  rect 1.1x0.6 smd: 2(-1.4,0.052) 3(-1.4,-0.948) 4(1.4,-0.948) 5(1.4,1.052)
  silkscreen extent -0.52,-1.45 0.55,1.55
SOT26 [mm]
  oval 1.1x0.6 smd: 1(-1.4,0.996)
  rect 1.1x0.6 smd: 2(-1.4,-0.004) 3(-1.4,-1.004) 4(1.4,-1.004) 5(1.4,-0.004) 6(1.4,0.996)
  silkscreen extent -0.52,-1.5 0.55,1.5
SOT28 [mm]
  rect 0.8x0.45 smd: 1(-1.375,0.975) 2(-1.375,0.325) 3(-1.375,-0.325) 4(-1.375,-0.975) 5(1.375,-0.975) 6(1.375,-0.325) 7(1.375,0.325) 8(1.375,0.975)
  silkscreen extent -0.97,-1.55 0.97,1.55
SOT223 [mil]
  rect 45x65 smd: 1(-91,-125) 2(0,-125) 3(91,-125)
  rect 118x65 smd: 4(0,125)
  silkscreen extent -125,-65 125,65
SOT233 [mil]
  round 60 hole 31.5: 1(0,0) 2(-110,0) 3(100,0)
  silkscreen extent -117,-59 117,120
SOT-89 [mm] "SOT89, 3-Leads, Body 4.5x2.5mm (max), Pitch 1.50mm, Lead Span 3.6mm, IPC Medium Density"
  rect 1.8x0.9 smd: 1(-1.425,1.5) 3(-1.425,-1.5)
  rect 2x0.96 smd: 2(-1.325,0)
  oct 3.4x2 smd: 2(1.325,0)
  silkscreen extent -2.1,-2.35 1.91,2.62, body extent -1.9,-2.35 2.4,2.35, height 1.65
SP6D38 [mm]
  rect 6.8x2.54 smd: 1(0.001,-0.007) 2(0.001,-4.807)
  silkscreen extent -3.9,-6.62 3.9,1.79
SSOP-PCM1606E [mil]
  oval 70x13 smd: 1(-140,166.4) 2(-140,140.8) 3(-140,115.2) 4(-140,89.6) 5(-140,64) 6(-140,38.4) 7(-140,12.8) 8(-140,-12.8) 9(-140,-38.4) 10(-140,-64) 11(140,-64) 12(140,-38.4) 13(140,-12.8) 14(140,12.8) 15(140,38.4) 16(140,64) 17(140,89.6) 18(140,115.2) 19(140,140.8) 20(140,166.4)
  silkscreen extent -80,-75 80,190
TO220-123-DY# [mm]
  oval 3x1.524 hole 1: 1(0,0) 2(0,2.54) 3(0,5.08)
  silkscreen extent -3,-2.9 2,8.1
TP1A [mm]
  round 2.5 smd: 1(0,0)
TP1AA [mm]
  rect 2.5x2.5 smd: 1(0,0)
TP1B [mm]
  round 2 smd: 1(0,0)
TP1BA [mm]
  rect 2x2 smd: 1(0,0)
TP1CA [mm]
  round 1.5 smd: 1(0,0)
TP1CAA [mm]
  rect 1.5x1.5 smd: 1(0,0)
TP1D [mm]
  round 0.8 smd: 1(0,0)
TP1DA [mm]
  rect 0.8x0.8 smd: 1(0,0)
TP1E [mm]
  round 1 smd: 1(0,0)
TP1EA [mm]
  rect 1x1 smd: 1(0,0)
TP1F [mm]
  round 1.2 smd: 1(0,0)
TP1FA [mm]
  rect 1.2x1.2 smd: 1(0,0)
TQFP48 [mm]
  rect 1.5x0.25 smd: 1(-4.15,2.75) 2(-4.15,2.25) 3(-4.15,1.75) 4(-4.15,1.25) 5(-4.15,0.75) 6(-4.15,0.25) 7(-4.15,-0.25) 8(-4.15,-0.75) 9(-4.15,-1.25) 10(-4.15,-1.75) 11(-4.15,-2.25) 12(-4.15,-2.75) 25(4.25,-2.75) 26(4.25,-2.25) 27(4.25,-1.75) 28(4.25,-1.25) 29(4.25,-0.75) 30(4.25,-0.25) 31(4.25,0.25) 32(4.25,0.75) 33(4.25,1.25) 34(4.25,1.75) 35(4.25,2.25) 36(4.25,2.75)
  rect 0.25x1.5 smd: 13(-2.75,-4.25) 14(-2.25,-4.25) 15(-1.75,-4.25) 16(-1.25,-4.25) 17(-0.75,-4.25) 18(-0.25,-4.25) 19(0.25,-4.25) 20(0.75,-4.25) 21(1.25,-4.25) 22(1.75,-4.25) 23(2.25,-4.25) 24(2.75,-4.25) 37(2.75,4.15) 38(2.25,4.15) 39(1.75,4.15) 40(1.25,4.15) 41(0.75,4.15) 42(0.25,4.15) 43(-0.25,4.15) 44(-0.75,4.15) 45(-1.25,4.15) 46(-1.75,4.15) 47(-2.25,4.15) 48(-2.75,4.15)
  silkscreen extent -4.04,-3.62 3.62,4.04
TSOP54P [mm]
  oval 0.4x2 smd: 1(-10.4,-5.88) 2(-9.6,-5.88) 3(-8.8,-5.88) 4(-8,-5.88) 5(-7.2,-5.88) 6(-6.4,-5.88) 7(-5.6,-5.88) 8(-4.8,-5.88) 9(-4,-5.88) 10(-3.2,-5.88) 11(-2.4,-5.88) 12(-1.6,-5.88) 13(-0.8,-5.88) 14(0,-5.88) 15(0.8,-5.88) 16(1.6,-5.88) 17(2.4,-5.88) 18(3.2,-5.88) 19(4,-5.88) 20(4.8,-5.88) 21(5.6,-5.88) 22(6.4,-5.88) 23(7.2,-5.88) 24(8,-5.88) 25(8.8,-5.88) 26(9.6,-5.88) 27(10.4,-5.88) 28(10.4,5.88) 29(9.6,5.88) 30(8.8,5.88) 31(8,5.88) 32(7.2,5.88) 33(6.4,5.88) 34(5.6,5.88) 35(4.8,5.88) 36(4,5.88) 37(3.2,5.88) 38(2.4,5.88) 39(1.6,5.88) 40(0.8,5.88) 41(0,5.88) 42(-0.8,5.88) 43(-1.6,5.88) 44(-2.4,5.88) 45(-3.2,5.88) 46(-4,5.88) 47(-4.8,5.88) 48(-5.6,5.88) 49(-6.4,5.88) 50(-7.2,5.88) 51(-8,5.88) 52(-8.8,5.88) 53(-9.6,5.88) 54(-10.4,5.88)
  silkscreen extent -10.9,-4.32 10.9,4.32
TSOP-48A [mm]
  rect 0.6x1.4 smd: 1(-0.15,0) 24(11.65,0) 25(11.65,20) 48(-0.15,20)
  rect 0.3x1.4 smd: 2(0.5,0) 3(1,0) 4(1.5,0) 5(2,0) 6(2.5,0) 7(3,0) 8(3.5,0) 9(4,0) 10(4.5,0) 11(5,0) 12(5.5,0) 13(6,0) 14(6.5,0) 15(7,0) 16(7.5,0) 17(8,0) 18(8.5,0) 19(9,0) 20(9.5,0) 21(10,0) 22(10.5,0) 23(11,0) 26(11,20) 27(10.5,20) 28(10,20) 29(9.5,20) 30(9,20) 31(8.5,20) 32(8,20) 33(7.5,20) 34(7,20) 35(6.5,20) 36(6,20) 37(5.5,20) 38(5,20) 39(4.5,20) 40(4,20) 41(3.5,20) 42(3,20) 43(2.5,20) 44(2,20) 45(1.5,20) 46(1,20) 47(0.5,20)
  silkscreen extent -0.25,1 11.75,19
TSSOP8 [mm]
  oval 0.3x1.5 smd: 1(-0.975,-2.6) 2(-0.325,-2.6) 3(0.325,-2.6) 4(0.975,-2.6) 5(0.975,2.6) 6(0.325,2.6) 7(-0.325,2.6) 8(-0.975,2.6)
  silkscreen extent -1.61,-1.23 1.61,1.23
TSSOP-10 [mm]
  rect 0.254x1.2 smd: 1(-1,-2.4)
  oval 0.254x1.2 smd: 2(-0.5,-2.4) 3(0,-2.4) 4(0.5,-2.4) 5(1,-2.4) 6(1,2.4) 7(0.5,2.4) 8(0,2.4) 9(-0.5,2.4) 10(-1,2.4)
  silkscreen extent -1.6,-1.4 1.5,1.4
VR [mm]
  rect 1.2x1.2 smd: 1(1.041,5.029) 3(-1.041,5.004)
  rect 1.5x1.5 smd: 2(-0.025,1.93)
  silkscreen extent -1.7,1.89 1.7,5.29
WQFN10 [mm]
  rect 0.3x0.5 smd: 1(-0.2,-0.45)
  rect 0.2x0.4 smd: 2(0.2,-0.5) 6(0.2,0.5) 7(-0.2,0.5)
  rect 0.4x0.2 smd: 3(0.762,-0.4) 4(0.762,0) 5(0.762,0.4) 8(-0.7,0.4) 9(-0.7,0) 10(-0.7,-0.4)
  silkscreen extent -0.91,-1.08 0.98,0.7
X1 [mil]
  round 70 hole 35: 1(0,0) 2(-200,0)
  silkscreen extent -310,-90 110,90
XT2X6AA [mil]
  oval 40x88 smd: 1(-30,-0.26) 2(30,-0.26)
  silkscreen extent -51,58 54,312
XT2X6DAA [mil]
  round 40 hole 20: 1(-37.3,8.47) 2(42.7,8.47)
  silkscreen extent -51,-351 49,-37
XT3225SMD [mm]
  rect 1.4x1.15 smd: 1(-1.1,-0.8) 2(1.1,-0.8) 3(1.1,0.8) 4(-1.1,0.8)
  silkscreen extent -1.8,-1.7 1.8,1.25
XT6035SMD [mm]
  rrect50% 2.38x1.38 smd: 1(-2.3,-1.18)
  rect 2.38x1.38 smd: 2(2.3,1.18) 3(-2.3,1.18) 4(2.3,-1.18)
  silkscreen extent -3.2,-2 3.23,2
XT7535SMD [mm]
  rrect50% 2.5x1.8 smd: 1(-2.3,-2)
  rect 2.5x1.8 smd: 2(3,2.05) 3(-2.3,2.05) 4(3,-2)
  silkscreen extent -3.2,-2.57 3.94,2.54
XTAL5$2F$S [mm]
  rect 2x1.2 smd: 1(-5.7,0) 2(5.7,0)
  silkscreen extent -5.8,-2.4 5.78,2.4

## Free pads (board coordinates)
  round 0.2 hole 0.2 unplated: 23(-15.938,7.954)
  round 0.3 hole 0.3 unplated: 24(-15.938,7.141)
  round 0.6 hole 0.6 unplated: 25(-15.938,5.186)
  round 0.5 hole 0.5 unplated: 25(-15.938,6.278)
  round 0.7 hole 0.7 unplated: 26(-15.938,4.068)
  round 0.8 hole 0.8 unplated: 27(-15.938,2.823)
  round 0.9 hole 0.9 unplated: 28(-15.938,1.503)
  round 1 hole 1 unplated: 29(-15.938,-0.021)
  round 1.1 hole 1.1 unplated: 30(-15.938,-1.698)
  round 1.2 hole 1.2 unplated: 31(-15.938,-3.323)
  round 1.3 hole 1.3 unplated: 32(-15.938,-5.228)
  round 2 hole 2 unplated: 33(-11.264,-5.33)
  round 1.9 hole 1.9 unplated: 34(-11.264,-2.815)
  round 1.8 hole 1.8 unplated: 35(-184,10) 35(-174,10) 35(-164,10) 35(-144,10) 35(-134,10) 35(-114,10) 35(-104,10) 35(-94,10) 35(-74,10) 35(-64,10) 35(-54,10) 35(-44,10) 35(-34,10) 35(-24,10) 35(-14,10) 35(-11.264,-0.352) 35(0,0) 35(0,0)
  round 1.8 on Bottom Solder: 35(0,0)
  round 1.7 hole 1.7 unplated: 36(-11.264,2.011)
  round 1.6 hole 1.6 unplated: 37(-11.264,4.398)
  round 1.5 hole 1.5 unplated: 38(-11.264,6.583)
  round 1.4 hole 1.4 unplated: 39(-11.264,8.691)
  round 3 hole 3 unplated: 40(-7.048,7.878)
  round 2.5 hole 2.5 unplated: 41(-7.048,11.358)
  round 3.5 hole 3.5 unplated: 42(-7.048,3.763)
  round 4 hole 4 unplated: 43(-7.048,-0.682)
  round 4.5 hole 4.5 unplated: 44(-7.048,-5.533)
  round 5 hole 5 unplated: 45(-7.048,-11.045)

## Nets (pads, with @x,y where several pads share a name; then routed paths per layer and width w, separated by ;. In a path a pad name is that pad's centre, name@x,y a point inside that pad or via, vN(x,y) a via of type N, cw(c..) or ccw(c..) an arc to the next point about the centre after c; other vN are vias at no path point)
pads on no net: C4.A1 C4.A2 C4.A3 C4.A4 C4.A8 C4.A9 C4.A10 C4.A11 C4.B1 C4.B2 C4.B3 C4.B4 C4.B8 C4.B9 C4.B10 C4.B11 C4.C1 C4.C2 C4.C3 C4.C4 C4.C8 C4.C9 C4.C10 C4.C11 C4.D1 C4.D2 C4.D3 C4.D4 C4.D8 C4.D9 C4.D10 C4.D11 C4.E1 C4.E2 C4.E3 C4.E4 C4.E8 C4.E9 C4.E10 C4.E11 C4.F1 C4.F2 C4.F3 C4.F4 C4.F8 C4.F9 C4.F10 C4.F11 C4.G1 C4.G2 C4.G3 C4.G4 C4.G8 C4.G9 C4.G10 C4.G11 C4.H1 C4.H2 C4.H3 C4.H4 C4.H8 C4.H9 C4.H10 C4.H11 C4.J1 C4.J2 C4.J3 C4.J4 C4.J8 C4.J9 C4.J10 C4.J11 C4.K1 C4.K2 C4.K3 C4.K4 C4.K8 C4.K9 C4.K10 C4.K11 C4.L1 C4.L2 C4.L3 C4.L4 C4.L8 C4.L9 C4.L10 C4.L11 C4.M1 C4.M2 C4.M3 C4.M4 C4.M8 C4.M9 C4.M10 C4.M11 C4.N1 C4.N2 C4.N3 C4.N4 C4.N8 C4.N9 C4.N10 C4.N11 C4.P1 C4.P2 C4.P3 C4.P4 C4.P8 C4.P9 C4.P10 C4.P11 C4.R1 C4.R2 C4.R3 C4.R4 C4.R8 C4.R9 C4.R10 C4.R11 C6.1 C6.2 C6.3 C6.4 C6.5 C6.6 C6.7 C6.8 C6.9 C6.10 C6.11 C6.12 C6.13 C6.14 C6.15 C6.16 C6.17 C6.18 C6.19 C6.20 C6.21 C6.22 C6.23 C6.24 C6.25 C6.26 C6.27 C6.28 C6.29 C6.30 C6.31 C6.32 C6.33 C6.34 C6.35 C6.36 C6.37 C6.38 C6.39 C6.40 C6.41 C6.42 C6.43 C6.44 C6.45 C6.46 C6.47 C6.48 C7.1 C8.1 C9.1 C10.1 C11.1 C12.1 C13.1 C14.1 C15.1 C16.1 C17.1 C18.1 C21.1 C21.2 C22.1 C22.2 C23.1 C23.2 C25.1 C25.2 C25.3 C25.4 C25.5 C25.6 C25.7 C25.8 C25.9 C25.10 C26.1 C26.2 C26.3 C26.4 C26.5 C26.6 C26.7 C26.8 C27.1 C27.2 C27.3 C27.4 C27.5 C27.6 C28.1 C28.2 C29.1 C29.2 C30.1 C30.2 C30.3 C30.4 C31.1 C31.2 C31.3 C31.4 C32.1 C32.2 C32.3 C32.4 C45.1 C45.2 C49.1 C49.2 CN9.1 CN9.2 CN9.3 CN9.4 CN9.5 CN9.6 CN9.7 CN9.8 CN14.1 CN14.2 CN14.3 CN14.4 CN14.5 CN14.6 CN14.7 CN14.8 CN14.9 CN14.10 CN14.11 CN14.12 CN14.13 CN14.14 CN14.15 CN14.16 CN14.17 CN14.18 CN14.19 CN14.20 CN14.21 CN14.22 CN14.23 CN14.24 CN14.25 CN14.26 CN14.27 CN14.28 CN22.1 CN22.2 CN28.1 CN28.2 CN28.3 CN28.4 CN28.5 CN28.6 CN28.7 CN28.8 CN28.9 CN28.10 CN28.11 CN28.12 CN28.13 CN28.14 CN28.15 CN28.16 CN28.17 CN28.18 CN35.1 CN35.2 CN35.3 CN35.4 CN35.5 CN35.6 CN35.7 CN35.8 CN37.1 CN37.2 D5.1 D5.2 D8.1 D8.2 D9.1 D9.2 D10.1 D10.2 DESIGNATOR1.1 DESIGNATOR1.2 DESIGNATOR1.3 DESIGNATOR1.4 DESIGNATOR1.5 DESIGNATOR1.6 DESIGNATOR1.7 DESIGNATOR1.8 DESIGNATOR1.9 DESIGNATOR1.10 DESIGNATOR1.11 DESIGNATOR1.12 DESIGNATOR1.13 DESIGNATOR1.14 DESIGNATOR1.15 DESIGNATOR1.16 DESIGNATOR1.17 DESIGNATOR1.18 DESIGNATOR1.19 DESIGNATOR1.20 DESIGNATOR1.21 DESIGNATOR1.22 DESIGNATOR1.23 DESIGNATOR1.24 DESIGNATOR1.25 DESIGNATOR1.26 DESIGNATOR1.27 DESIGNATOR1.28 DESIGNATOR1.29 DESIGNATOR1.30 DESIGNATOR1.31 DESIGNATOR1.32 DESIGNATOR1.33 DESIGNATOR1.34 DESIGNATOR1.35 DESIGNATOR1.36 DESIGNATOR1.37 DESIGNATOR1.38 DESIGNATOR1.39 DESIGNATOR1.40 DESIGNATOR1.41 DESIGNATOR1.42 DESIGNATOR1.43 DESIGNATOR1.44 DESIGNATOR1.45 DESIGNATOR1.46 DESIGNATOR1.47 DESIGNATOR1.48 DESIGNATOR1.49 DESIGNATOR1.50 DESIGNATOR1.51 DESIGNATOR1.52 DESIGNATOR1.53 DESIGNATOR1.54 DESIGNATOR1.55 DESIGNATOR1.56 DESIGNATOR1.57 DESIGNATOR1.$$$1 DESIGNATOR1.$$$2 EC10.1 EC10.2 EC11.1 EC11.2 EC12.1 EC12.2 L19.1 L19.2 L20.1 L20.2 L21.1 L21.2 L22.1 L22.2 L23.1 L23.2 P46.1 P46.2 P46.3 P46.A1 P46.A2 P46.A3 P46.A4 P46.A5 P46.A6 P46.A7 P46.A8 P46.A9 P46.A10 P46.A11 P46.A12 P46.A13 P46.A14 P46.A15 P46.B1 P46.B2 P46.B3 P46.B4 P46.B5 P46.B6 P46.B7 P46.B8 P46.B9 P46.B10 P46.B11 P46.B12 P46.B13 P46.B14 P46.B15 P46.C1 P46.C2 P46.C4 P46.C5 P46.C6 P46.C7 P46.C8 P46.C9 P46.C10 P46.C11 P46.C12 P46.C14 P46.C15 P46.D1 P46.D2 P46.D3 P46.D5 P46.D6 P46.D7 P46.D8 P46.D9 P46.D10 P46.D11 P46.D13 P46.D14 P46.D15 P46.E1 P46.E2 P46.E3 P46.E13 P46.E14 P46.E15 P46.F1 P46.F2 P46.F3 P46.F4 P46.F12 P46.F13 P46.F14 P46.F15 P46.G1 P46.G2 P46.G3 P46.G4 P46.G12 P46.G13 P46.G14 P46.G15 P46.H1 P46.H2 P46.H3 P46.H4 P46.H12 P46.H13 P46.H14 P46.H15 P46.J1 P46.J2 P46.J3 P46.J4 P46.J12 P46.J13 P46.J14 P46.J15 P46.K1 P46.K2 P46.K3 P46.K4 P46.K12 P46.K13 P46.K14 P46.K15 P46.L1 P46.L2 P46.L3 P46.L13 P46.L14 P46.L15 P46.M1 P46.M2 P46.M3 P46.M5 P46.M6 P46.M7 P46.M8 P46.M9 P46.M10 P46.M11 P46.M13 P46.M14 P46.M15 P46.N1 P46.N2 P46.N4 P46.N5 P46.N6 P46.N7 P46.N8 P46.N9 P46.N10 P46.N11 P46.N12 P46.N14 P46.N15 P46.P1 P46.P2 P46.P3 P46.P4 P46.P5 P46.P6 P46.P7 P46.P8 P46.P9 P46.P10 P46.P11 P46.P12 P46.P13 P46.P14 P46.P15 P46.R1 P46.R2 P46.R3 P46.R4 P46.R5 P46.R6 P46.R7 P46.R8 P46.R9 P46.R10 P46.R11 P46.R12 P46.R13 P46.R14 P46.R15 P47.1 P47.2 P47.3 P48.1 P48.2 P48.3 P48.4 P48.5 P48.6 P48.7 P48.8 P48.9 P48.10 P48.11 Q13.1 Q13.2 Q13.3 Q13.4 Q13.5 Q14.1 Q14.2 Q14.3 Q14.4 Q15.1 Q15.2 Q15.3 Q21.1 Q21.2 Q21.3 R10.1 R10.2 R11.1 R11.2 R12.1 R12.2 R14.1 R14.2 R15.1 R15.2 RN2.1 RN2.2 RN2.3 RN2.4 RN2.5 RN2.6 RN2.7 RN2.8 RV.1 RV.2 RV.3 U1.1 U1.2 U1.3 U1.4 U2.1 U2.2 U2.3 U2.4 U2.5 U2.6 U2.7 U2.8 U2.9 U2.10 U2.11 U2.12 U2.13 U2.14 U2.15 U2.16 U2.17 U2.18 U2.19 U2.20 U2.21 U2.22 U2.23 U2.24 U2.25 U2.26 U2.27 U2.28 U2.29 U2.30 U2.31 U2.32 U2.33 U2.34 U2.35 U2.36 U2.37 U2.38 U2.39 U2.40 U2.41 U2.42 U2.43 U2.44 U2.45 U2.46 U2.47 U2.48 U2.49 U2.50 U2.51 U2.52 U2.53 U2.54 U3.201 U3.202 U3.203 U3.204 U3.205 U3.206 U3.207 U3.208 U3.209 U3.210 U3.211 U3.212 U3.213 U3.214 U3.215 U3.216 U3.217 U3.218 U3.219 U3.220 U3.221 U3.222 U3.223 U3.224 U3.225 U3.226 U3.227 U3.228 U3.229 U3.230 U3.231 U3.232 U3.233 U3.234 U3.235 U3.236 U3.237 U3.238 U3.239 U3.240 U3.241 U3.242 U3.243 U3.244 U3.245 U3.246 U3.247 U3.248 U3.249 U3.250 U3.251 U3.252 U3.253 U3.254 U3.255 U3.256 U3.257 U3.258 U3.259 U3.260 U3.261 U3.262 U3.263 U3.264 U3.265 U3.266 U3.267 U3.268 U3.269 U3.270 U3.271 U3.272 U3.273 U3.274 U3.275 U3.276 U3.277 U3.278 U3.279 U3.280 U3.281 U3.282 U3.283 U3.284 U3.285 U3.286 U3.287 U3.288 U3.289 U3.290 U3.291 U3.292 U3.293 U3.294 U3.295 U3.296 U3.297 U3.298 U3.299 U3.300 U3.301 U3.302 U3.303 U3.304 U3.305 U3.306 U3.307 U3.308 U3.309 U3.310 U3.311 U3.312 U3.313 U3.314 U3.315 U3.316 U3.317 U3.318 U3.319 U3.320 U3.321 U3.322 U3.323 U3.324 U3.325 U3.326 U3.327 U3.328 U3.329 U3.330 U3.331 U3.332 U3.333 U3.334 U3.335 U3.336 U3.337 U3.338 U3.339 U3.340 U3.341 U3.362 U3.363 U3.364 U3.365 U3.366 U3.367 U3.368 U3.369 U3.370 U3.371 U3.372 U3.373 U3.374 U3.375 U3.376 U3.377 U3.378 U3.379 U3.380 U3.381 U3.382 U3.383 U3.384 U3.385 U3.386 U3.387 U3.388 U3.389 U3.390 U3.391 U3.392 U3.393 U3.394 U3.395 U3.396 U3.397 U3.398 U3.399 U3.400 U3.401 U3.402 U3.403 U3.404 U3.405 U3.406 U3.407 U3.408 U3.409 U3.410 U3.411 U3.412 U3.413 U3.414 U3.415 U3.416 U3.417 U3.418 U3.419 U3.420 U3.421 U3.422 U3.423 U3.424 U3.425 U3.426 U3.427 U3.428 U3.429 U3.430 U3.431 U3.432 U3.433 U3.434 U3.435 U3.436 U3.437 U3.438 U3.439 U3.440 U3.441 U3.442 U3.443 U3.444 U3.445 U3.446 U3.447 U3.448 U3.449 U3.450 U3.451 U3.452 U3.453 U3.454 U3.455 U3.456 U3.457 U3.458 U3.459 U3.460 U3.461 U3.462 U3.463 U3.464 U3.465 U3.466 U3.467 U3.468 U3.469 U3.470 U3.471 U3.472 U3.473 U3.474 U3.475 U3.476 U3.477 U3.478 U3.479 U3.480 U3.481 U3.482 U3.483 U3.484 U3.485 U3.486 U3.487 U3.488 U3.489 U3.490 U3.491 U3.492 U3.493 U3.494 U3.495 U3.496 U3.497 U3.498 U3.499 U3.500 U3.501 U3.502 U3.503 U3.504 U3.505 U3.506 U3.507 U3.508 U3.509 U3.510 U3.511 U3.512 U3.513 U3.514 U3.515 U3.516 U3.517 U3.518 U3.519 U3.520 U3.521 U3.522 U3.523 U3.524 U3.525 U3.526 U3.527 U3.528 U3.529 U3.530 U3.531 U3.532 U3.563 U3.564 U3.565 U3.566 U3.567 U3.568 U3.569 U3.570 U3.571 U3.572 U3.573 U3.574 U3.575 U3.576 U3.577 U3.578 U3.579 U3.580 U3.581 U3.582 U3.583 U3.584 U3.585 U3.586 U3.587 U3.588 U3.589 U3.590 U3.591 U3.592 U3.593 U3.594 U3.595 U3.596 U3.597 U3.598 U3.599 U3.600 U3.601 U3.602 U3.603 U3.604 U3.605 U3.606 U3.607 U3.608 U3.609 U3.610 U3.611 U3.612 U3.613 U3.614 U3.615 U3.616 U3.617 U3.618 U3.619 U3.620 U3.621 U3.622 U3.623 U3.624 U3.625 U3.626 U3.627 U3.628 U3.629 U3.630 U3.631 U3.632 U3.633 U3.634 U3.635 U3.636 U3.637 U3.638 U3.639 U3.640 U3.641 U3.642 U3.643 U3.644 U3.645 U3.646 U3.647 U3.648 U3.649 U3.650 U3.651 U3.652 U3.653 U3.654 U3.655 U3.656 U3.657 U3.658 U3.659 U3.660 U3.661 U3.662 U3.663 U3.664 U3.665 U3.666 U3.667 U3.668 U3.669 U3.670 U3.671 U3.672 U3.673 U3.674 U3.675 U3.676 U3.677 U3.678 U3.679 U3.680 U3.681 U3.682 U3.683 U3.684 U3.685 U3.686 U3.687 U3.688 U3.689 U3.690 U3.691 U3.692 U3.693 U3.694 U3.695 U3.696 U3.697 U3.698 U3.699 U3.700 U3.701 U3.702 U3.703 U3.704 U3.705 U3.706 U3.707 U3.708 U3.709 U3.710 U3.711 U3.712 U3.713 U3.714 U3.715 U3.716 U3.717 U3.718 U3.719 U3.720 U3.721 U3.722 U3.723 U3.724 U3.725 U3.726 U3.727 U3.728 U3.729 U3.730 U3.731 U3.732 U7.1 U7.2 U7.3 U7.4 U7.5 U7.6 U7.7 U7.8 U8.1 U8.2 U8.3 U8.4 U8.5 U8.6 U8.7 U8.8 U8.9 U8.10 U8.11 U8.12 U8.13 U8.14 U8.15 U8.16 U8.17 U8.18 U8.19 U8.20 U8.21 U8.22 U8.23 U8.24 U8.25 U8.26 U8.27 U8.28 U8.29 U8.30 U8.31 U8.32 U10.1 U10.2 U10.3 U10.4 U10.5 U10.6 U10.7 U10.8 U10.9 U10.10 U10.11 U10.12 U10.13 U10.14 U10.15 U10.16 U10.17 U10.18 U10.19 U10.20 U10.21 U10.22 U10.23 U10.24 U18.1 U18.2 U18.3 U18.4 U18.5 U18.6 U18.7 U18.8 U18.9 U18.10 U18.11 U18.12 U18.13 U18.14 U18.15 U18.16 U18.17 U18.18 U18.19 U18.20 U18.21 U18.22 U18.23 U18.24 U18.25 U18.26 U18.27 U18.28 U18.29 U18.30 U18.31 U18.32 U18.33 U18.34 U18.35 U18.36 U18.37 U18.38 U18.39 U18.40 U18.41 U18.42 U18.43 U18.44 U18.45 U18.46 U18.47 U18.48 U32.1 U32.2 U32.3 U32.4 U32.5 U32.6 U32.7 U32.8 U32.9 U32.10 U32.11 U32.12 U32.13 U32.14 U32.15 U32.16 U37.1 U37.2 U37.3 U37.4 U37.5 U37.6 U37.7 U37.8 U37.9 U37.10 U37.11 U37.12 U37.13 U37.14 U37.15 U37.16 U37.17 U37.18 U37.19 U37.20 U41.1 U41.2 U41.3 U41.4 U41.5 U41.6 U41.7 U41.8 U41.9 U41.10 U57.1 U57.2 U57.3 U57.4 U57.5 U57.6 U57.7 U57.8 U57.9 U57.10 U57.11 U57.12 U57.13 U57.14 U57.15 U57.16 U70.1 U70.2 U71.1 U71.2 U74.1 U74.2 U74.3 U74.4 U74.5 U74.6 XT3.1 XT3.2 Y2.1 Y2.2 Y2.3 Y2.4 Y2.5 Y2.6 Y2.7 Y2.8 Y2.9 Y2.10 Y2.11 Y2.12 Y2.13 Y2.14 Y2.15 Y2.16 Y2.17 Y2.18 Y2.19 Y2.20 Y2.21 Y2.22 Y2.23 Y2.24 Y2.25 Y2.26 Y2.27 Y2.28 Y2.29 Y2.30 Y2.31 Y2.32 Y2.33 Y2.34 Y2.35 Y2.36 Y2.37 Y2.38 Y2.39 Y2.40 Y2.41 Y2.42 Y2.43 Y2.44 Y2.45 Y2.46 Y2.47 Y2.48 Y3.1 Y3.2